# Altium PCB Optic_sensor.PcbDoc
Units mm, origin at the board's own origin, x right, y up, seen from the top; angles counter-clockwise.
Board outline 14 x 25 mm, 2 copper layers (Top Layer, Bottom Layer), stack 0.871 mm thick; 14 components, 7 nets, 34 pads, 11 vias.
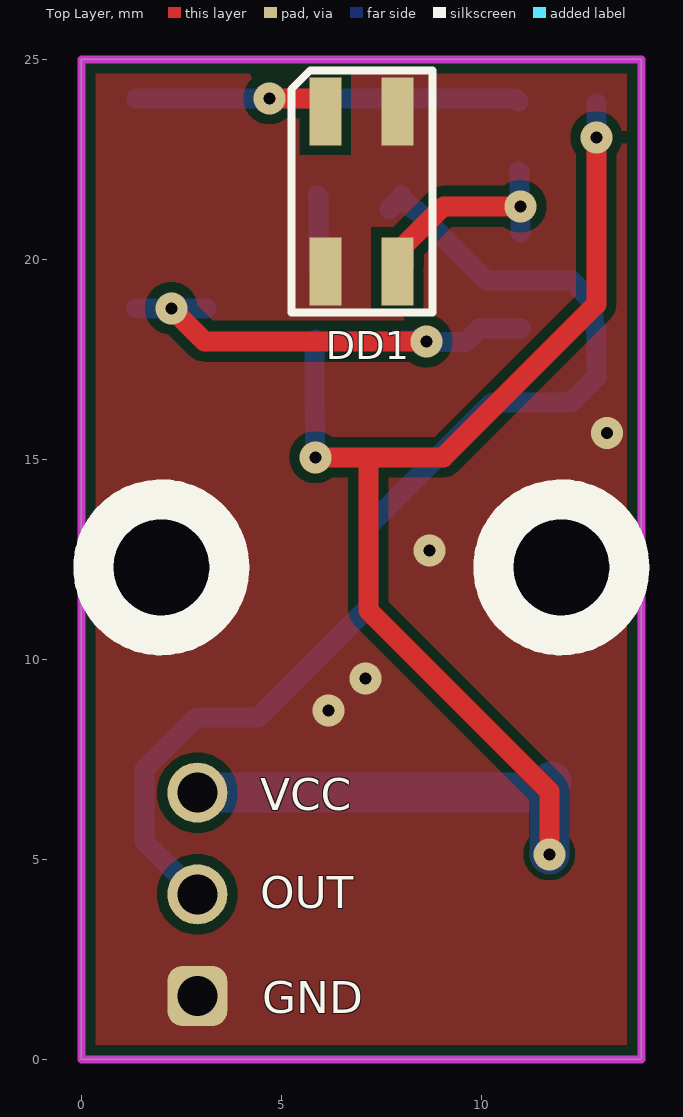
[diagram p0: Top Layer view]
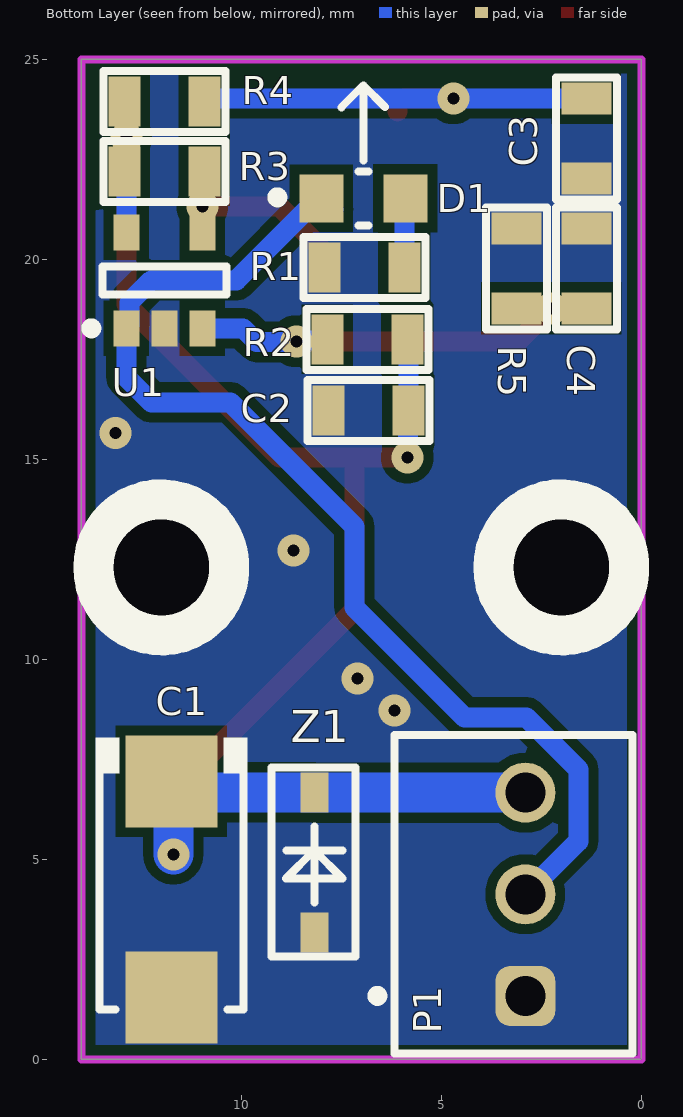
[diagram p1: Bottom Layer view, seen from below]
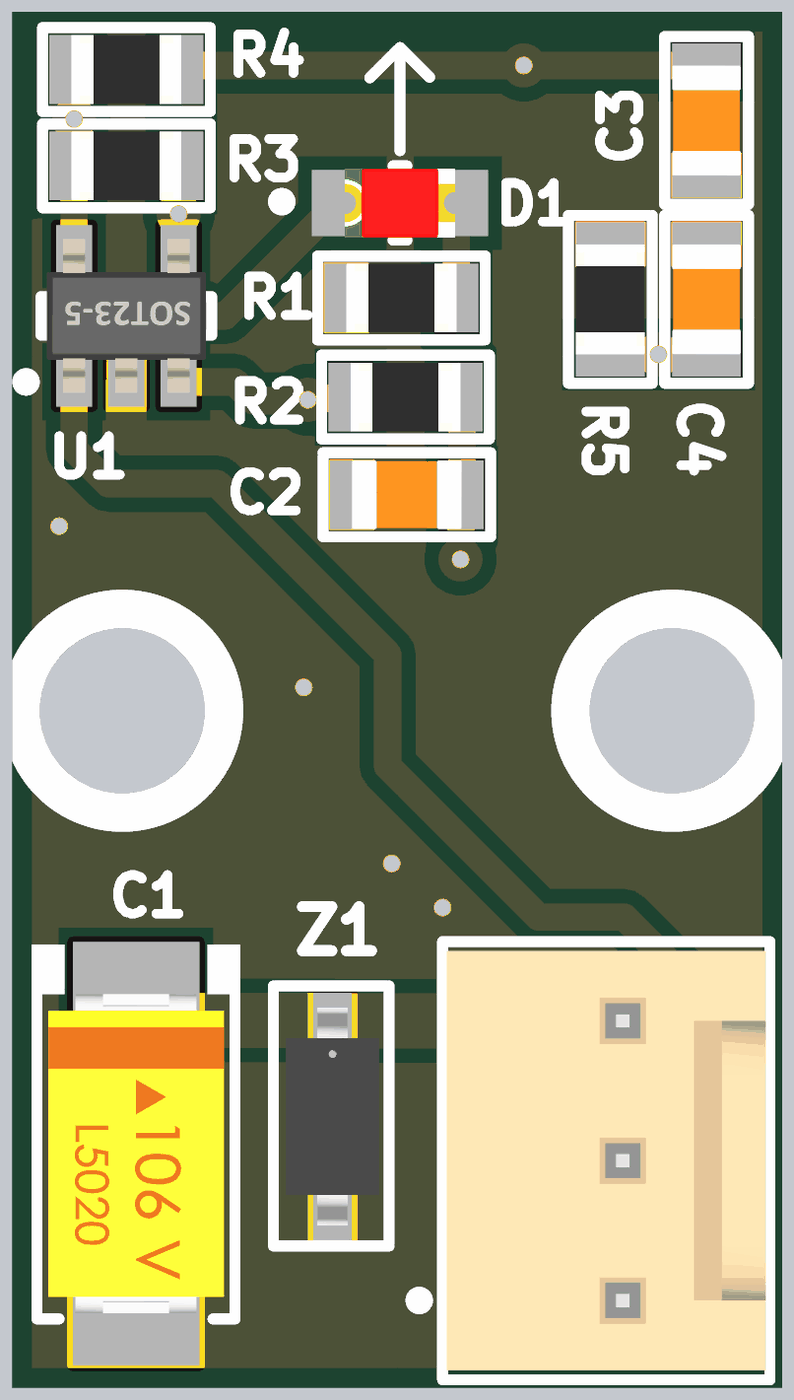
[diagram p2: 3D render of the assembled board from below, using the file's embedded part models]

## Layer stack, top to bottom
Top Solder: solder mask 0.0102, Solder Resist, Dk 3.5
Top Layer: signal copper 0.0356
Dielectric 1: dielectric 0.8, FR-4, Dk 4.8
Bottom Layer: signal copper 0.0356
Bottom Solder: solder mask 0.0102, Solder Resist, Dk 3.5

## Board outline
0,0 0,25 14,25 14,0
cut-out: 0.5,12.3 ccw(c2,12.3) 2,10.8 ccw(c2,12.3) 3.5,12.3 ccw(c2,12.3) 2,13.8 ccw(c2,12.3)
cut-out: 10.5,12.3 ccw(c12,12.3) 12,10.8 ccw(c12,12.3) 13.5,12.3 ccw(c12,12.3) 12,13.8 ccw(c12,12.3)

## Design rules (kind name [scope] priority, off if disabled: settings)
Clearance [All] p1: gap=0.254 ignorepadtopadclearanceinfootprint=FALSE except(0: Arc-Hole Track-Hole SMDPad-Hole THPad-Hole Via-Hole Fill-Hole Poly-Hole Region-Hole Text-Hole)
Height [All] p1: minheight=0 maxheight=101.6 prefheight=12.7
PlaneConnect [All] p1: planeconnectstyle=Direct reliefexpansion=0.508 reliefentries=4 reliefconductorwidth=0.254 reliefairgap=0.254
PolygonConnect [All] p1: connectstyle=Direct reliefconductorwidth=0.254 reliefentries=4 polygonreliefangle="90 Angle" airgapwidth=0.254
RoutingVias [All] p1: holewidth=0.711 width=1.27 viastyle="Through Hole" minholewidth=0.2 minwidth=0.5 maxholewidth=0.711 maxwidth=1.27
SolderMaskExpansion [All] p1: expansion=0.102 istentingtop=FALSE
Width [All] p1: maxlimit=3 minlimit=0.254 preferedwidth=1 minimp=50.000000 maximp=50.000000 favimp=50.000000
28 further rules are at their usual default settings.

## Components (designator, comment, footprint, x,y, rotation, side; value= is the part's Value field where it differs from the comment)
C1 "CAP-POLAR" CAP-TAN-C 11.75,4.25 r270 bottom
C2 "CAP-NON-POLAR" CAP-0805 6.825,16.225 r180 bottom
C3 "CAP-NON-POLAR" CAP-0805 1.375,23.025 r90 bottom
C4 "CAP-NON-POLAR" CAP-0805 1.375,19.775 r270 bottom
D1 "151031YS06000" LED_RED 6.95,21.525 r180 bottom locked
DD1 "QRE1113" QRE1113 7,21.7 r270 top
P1 "61900311121" 61900311121 3.2,4.125 r270 bottom locked
R1 "10K" RES-0805 6.925,19.8 r180 bottom
R2 "1***K" RES-0805 6.85,18 r180 bottom
R3 "1K" RES-0805 11.925,22.2 r0 bottom locked
R4 "1***K" RES-0805 11.925,23.95 r0 bottom locked
R5 "1K" RES-0805 3.125,19.775 r270 bottom
U1 "OP AMP" SOT-23-5 11.925,19.475 r90 bottom locked
Z1 "BZX384-C5V1" SOD-123 8.175,4.925 r270 bottom

## Footprints (in the part's own frame and the unit in brackets; to place one, negate y for a bottom-side part, rotate by r counter-clockwise, add the part's x,y. Pads: shape width x height; smd on the part's side, far side on the other; paste and mask are expansions set on the pad)
61900311121 [mm] "2.54mm Male Locking Header, 3p"
  rrect50% 1.5x1.5 hole 1: 1(2.54,0.3)
  round 1.5 hole 1: 2(0,0.3) 3(-2.54,0.3)
  silkscreen extent -3.98,-3.52 3.98,2.98, body extent -3.81,-2.9 3.81,2.9, height 11.53
CAP-0805 [mm]
  rect 0.8x1.25 smd mask+0.015: 1(-1,0) 2(1,0)
  silkscreen extent -1.52,-0.76 1.52,0.76, body extent -1,-0.62 1,0.63, height 0.8
CAP-TAN-C [mm]
  rect 2.3x2.3 smd: 1(-2.7,0) 2(2.7,0)
  silkscreen extent -3.8,-1.9 3,1.9, body extent -2.9,-1.6 2.9,1.6, height 2.6
LED_RED [mm]
  rect 1.1x1.2 smd paste+0 mask+0: 1(-1.05,0) 2(1.05,0)
  silkscreen extent -2.28,-0.67 0.13,0.67, body extent -1,-0.63 1,0.63, height 0.8
QRE1113 [mm]
  rect 1.7x0.8 smd: 1(-2,-0.9) 2(2,-0.9) 3(2,0.9) 4(-2,0.9)
  silkscreen extent -3.03,-1.75 3.03,1.78, body extent -2.2,-1.7 2.3,1.7, height 1.55
RES-0805 [mm]
  rect 0.8x1.25 smd mask+0.015: 1(-1,0) 2(1,0)
  silkscreen extent -1.52,-0.76 1.52,0.76, body extent -1,-0.62 1,0.63, height 0.6
SOD-123 [mm]
  rect 1x0.7 smd: 1(-1.75,0) 2(1.75,0)
  silkscreen extent -2.37,-1.08 2.35,1.02, body extent -1.98,-0.85 1.98,0.85, height 1.45
SOT-23-5 [mm]
  rect 0.9x0.65 smd: 1(-1.2,0.95) 2(-1.2,0) 3(-1.2,-0.95) 4(1.2,-0.95) 5(1.2,0.95)
  silkscreen extent -1.32,-1.55 0.35,1.95, body extent -1.4,-1.45 1.4,1.45, height 1.24

## Part data
D1: library part LED, "WURTH ELEKTRONIK - 151031YS06000 - LED, Yellow, Through Hole, T-1 (3mm), 30 mA, 2 V, 590 nm", Manufacturer_Name="Wurth Elektronik", Mouser Part Number=710-151031YS06000, Datasheet Link=https://katalog.we-online.de/led/datasheet/151031YS06000.pdf, Geometry.Height=5.5mm, Manufacturer_Part_Number=151031YS06000, Mouser Price/Stock=https://www.mouser.co.uk/ProductDetail/Wurth-Elektronik/151031YS06000?qs=LlUlMxKIyB3xSYYW%252BcuBiQ%3D%3D
P1: "WR-WTB THT Male Vertical Locking Header, pitch 2.54mm, 3pins", Contact Resistance=20mΩ, Manufacturer="Wurth Elektronik", Operating Temperature Max=105°C, Operating Temperature Min=-40°C, Rated Current=3A, Withstanding Voltage=1000VAC, Working Voltage=250VAC, Category="Wire-to-Board Connectors", ComponentLink1Description="Website Link", ComponentLink1URL=https://www.we-online.com/redexpert/article/61900311121?ad, ComponentLink2Description="Datasheet Link", ComponentLink2URL=https://www.we-online.com/redexpert/spec/61900311121?ad, Gender=Male, Height=11.5mm, Length=7.62mm, Manufacturer Part Number=61900311121, Match Code=WR-WTB, Mount="Through Hole", Number of Pins=3, Number of Rows=1, Orientation=Vertical, Packaging=Bag, Pitch=2.54mm, Width=5.8mm
R1 R3 R5: library part RES-CONST
R2 R4: library part RES-CONST, "1K"
U1: library part MCP6001T

## Via types
v1: diameter 0.8, hole 0.3, Top Layer to Bottom Layer, tented both sides, 11 vias

## Nets (pads, with @x,y where several pads share a name; then routed paths per layer and width w, separated by ;. In a path a pad name is that pad's centre, name@x,y a point inside that pad or via, vN(x,y) a via of type N, cw(c..) or ccw(c..) an arc to the next point about the centre after c; other vN are vias at no path point)
GND: C1.2 C2.1 C3.1 C4.1 DD1.2 DD1.4 P1.1 R1.1 R5.1 U1.2 Z1.2
  other v1: 6.175,8.725 7.1,9.525 8.7,12.725 13.148,15.655
NetC1_1: C1.1 C2.2 P1.3 R2.2 R3.2 R4.2 U1.5 Z1.1 | length 41.6
  Top Layer w0.5: v1(5.85,15.05) 7.175,15.05 ; v1(11.7,5.125) 11.7,6.7 7.175,11.225 7.175,15.05 ; v1(12.875,23.05) 12.875,18.875 9.05,15.05 7.175,15.05
  Bottom Layer w0.5: v1(5.85,15.05) 5.838,15.062 5.838,16.213 C2.2 5.825,17.975 R2.2 ; U1.5 v1(12.875,23.05) R4.2@12.875,23.9
  Bottom Layer w1: P1.3 8.165,6.665 Z1.1 11.475,6.675 C1.1@11.725,6.925 ; v1(11.7,5.125) 11.7,6.9 C1.1@11.725,6.925 ; C1.1 C1.1@11.725,6.925
NetC3_2: C3.2 DD1.1 R4.1 | length 11.2
  Top Layer w0.5: v1(4.7,24.025) 5.95,24.025 6.1,23.875 DD1.1
  Bottom Layer w0.5: C3.2 v1(4.7,24.025) 10.85,24.025 R4.1
NetC4_2: C4.2 R2.1 R5.2 U1.3 | length 11.8
  Top Layer w0.5: v1(2.25,18.775) 3.075,17.95 v1(8.625,17.95)
  Bottom Layer w0.5: C4.2 R5.2 ; R2.1 7.875,17.975 8.6,17.975 v1(8.625,17.95) ; v1@8.575,17.934 9.617,17.934 9.958,18.275 U1.3
NetD1_1: D1.1 P1.2 U1.1 | length 28.5
  Bottom Layer w0.5: P1.2 1.575,5.45 1.575,7.25 2.875,8.55 4.425,8.55 7.175,11.3 7.175,13.325 10.275,16.425 12.25,16.425 12.875,17.05 U1.1 12.8,18.35 12.8,18.925 12.25,19.475 10.125,19.475 8.35,21.25 8.3,21.25 D1.1@8,21.55 ; D1.1@7.7,21.25 D1.1@8,21.55 ; D1.1@8,21.6 D1.1@8,21.55
NetD1_2: D1.2 R1.2 | length 1.8
  Bottom Layer w0.5: D1.2@5.9,21.6 5.925,21.575 R1.2
NetDD1_3: DD1.3 R3.1 U1.4 | length 5.6
  Top Layer w0.5: DD1.3 8.05,19.85 8.05,20.325 9.05,21.325 v1(10.975,21.325)
  Bottom Layer w0.5: R3.1 10.95,22.175 10.95,21.35 v1(10.975,21.325) U1.4

## Polygon pours and split planes (outlines as drawn)
GND on Top Layer "GND_L01_P003" (solid, pour order 3): 0,0 0,25 14,25 14,0
GND on Bottom Layer "GND_L02_P002" (solid, pour order 2): 0,0 0,25 14,25 14,0

## Keep-outs
Keep-Out Layer:
  circle w0.254: c2,12.3 r1.5
  circle w0.254: c12,12.3 r1.5
  lines w0.2: 0,0 0,10.9 0,25 2,25 12,25 14,25 14,10.95 14,0 0,0

## Silkscreen, mask and mechanical layers (free items; w line width, h text height)
Top Overlay:
  circle w1: c12,12.3 r1.7
  circle w1: c2,12.3 r1.7
  text "VCC" at 4.479,6.229 h0.8
  text "OUT" at 4.479,3.779 h0.8
  text "GND" at 4.529,1.154 h0.8
Bottom Overlay:
  circle w1: c12,12.3 r1.7
  circle w1: c2,12.3 r1.7
  lines w0.2: 6.411,23.811 6.95,24.35 ; 6.95,22.475 6.95,24.35 ; 7.5,23.8 6.95,24.35
Top 3D Body:
  region: 51.387,3.185 51.524,3.094 51.615,2.958 51.647,2.797 51.639,1.972 51.647,1.972 51.615,1.811 51.524,1.674 51.387,1.583 51.226,1.551 50.401,1.559 50.401,1.551 50.24,1.583 50.104,1.674 50.013,1.811 49.981,1.972 49.989,2.797 49.981,2.797 50.013,2.958 50.104,3.094 50.24,3.185 50.401,3.217 50.401,3.209 51.226,3.209 51.226,3.217
Bottom 3D Body:
  circle w0.013: c40.654,2.384 r0.825
  circle w0.013: c38.114,2.384 r0.825
  circle w0.013: c43.194,2.384 r0.825
  circle w0.013: c35.574,2.384 r0.825
  circle w0.013: c45.734,2.384 r0.825
  circle w0.013: c12.714,2.384 r0.825
  circle w0.013: c10.174,2.384 r0.825
  circle w0.013: c7.634,2.384 r0.825
  circle w0.013: c48.274,2.384 r0.825
  circle w0.013: c20.334,2.384 r0.825
  circle w0.013: c22.874,2.384 r0.825
  circle w0.013: c30.494,2.384 r0.825
  circle w0.013: c15.254,2.384 r0.825
  circle w0.013: c27.954,2.384 r0.825
  circle w0.013: c25.414,2.384 r0.825
  circle w0.013: c33.034,2.384 r0.825
  circle w0.013: c17.794,2.384 r0.825
  circle w0.013: c15.254,2.384 r0.825
  circle w0.013: c17.794,2.384 r0.825
  circle w0.013: c20.334,2.384 r0.825
  circle w0.013: c22.874,2.384 r0.825
  circle w0.013: c25.414,2.384 r0.825
  circle w0.013: c27.954,2.384 r0.825
  circle w0.013: c30.494,2.384 r0.825
  circle w0.013: c33.034,2.384 r0.825
  circle w0.013: c35.574,2.384 r0.825
  circle w0.013: c45.734,2.384 r0.825
  circle w0.013: c48.274,2.384 r0.825
  circle w0.013: c43.194,2.384 r0.825
  circle w0.013: c40.654,2.384 r0.825
  circle w0.013: c38.114,2.384 r0.825
  circle w0.013: c12.714,2.384 r0.825
  circle w0.013: c10.174,2.384 r0.825
  circle w0.013: c7.634,2.384 r0.825
  region: 51.387,3.185 51.524,3.094 51.615,2.958 51.647,2.797 51.639,1.972 51.647,1.972 51.615,1.811 51.524,1.674 51.387,1.583 51.226,1.551 50.401,1.559 50.401,1.551 50.24,1.583 50.104,1.674 50.013,1.811 49.981,1.972 49.989,2.797 49.981,2.797 50.013,2.958 50.104,3.094 50.24,3.185 50.401,3.217 50.401,3.209 51.226,3.209 51.226,3.217
Top Assembly:
  lines w0.013: -0.5,-0.009 -0.5,54.991 59.5,54.991 59.5,-0.009 -0.5,-0.009
Bottom Assembly:
  circle w0.013: c15.254,2.384 r0.825
  circle w0.013: c17.794,2.384 r0.825
  circle w0.013: c20.334,2.384 r0.825
  circle w0.013: c22.874,2.384 r0.825
  circle w0.013: c25.414,2.384 r0.825
  circle w0.013: c27.954,2.384 r0.825
  circle w0.013: c30.494,2.384 r0.825
  circle w0.013: c33.034,2.384 r0.825
  circle w0.013: c35.574,2.384 r0.825
  circle w0.013: c45.734,2.384 r0.825
  circle w0.013: c48.274,2.384 r0.825
  circle w0.013: c43.194,2.384 r0.825
  circle w0.013: c40.654,2.384 r0.825
  circle w0.013: c38.114,2.384 r0.825
  circle w0.013: c12.714,2.384 r0.825
  circle w0.013: c10.174,2.384 r0.825
  circle w0.013: c7.634,2.384 r0.825
  region: 51.387,3.185 51.524,3.094 51.615,2.958 51.647,2.797 51.639,1.972 51.647,1.972 51.615,1.811 51.524,1.674 51.387,1.583 51.226,1.551 50.401,1.559 50.401,1.551 50.24,1.583 50.104,1.674 50.013,1.811 49.981,1.972 49.989,2.797 49.981,2.797 50.013,2.958 50.104,3.094 50.24,3.185 50.401,3.217 50.401,3.209 51.226,3.209 51.226,3.217